# EAGLE board schema (EAGLE 7.6.0)
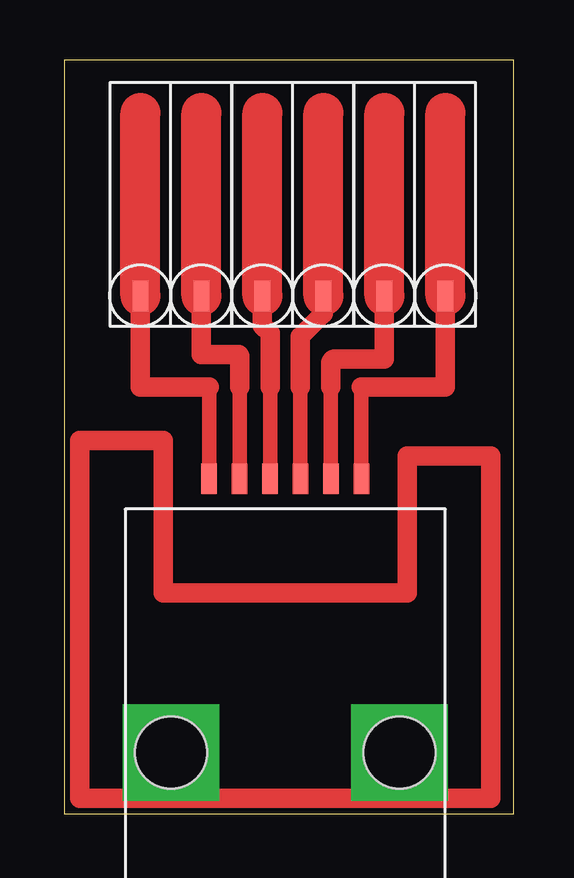
[diagram p0: board, top side]

Size 18.72 x 31.42 mm. Coordinates in mm from the lower left corner, seen from the top.
Outline: 0,0 18.72,0 18.72,31.42 0,31.42 0,0
Copper layers (1*16): Top 0.035mm / dielectric 1.5mm / Bottom 0.035mm
Design rules "default": minimum track width 10mil, minimum drill 24mil, track to track 8mil, track to pad 8mil, pad to pad 8mil, via to via 8mil, smd to smd 8mil, copper to edge 40mil, drill to drill 8mil, minimum pad ring 10mil, minimum via ring 8mil, stop-mask expansion 4mil, vias tented up to drill 0mil, thermal gap 10mil

## Footprints (pad centres in the part's own frame; a part is rotated, then mirrored left to right if it is on the bottom)
RJ12_SMD = smd 0.635 x 1.27: 1 -2.857,5.08; 2 -1.587,5.08; 3 -0.318,5.08; 4 0.953,5.08; 5 2.223,5.08; 6 3.493,5.08 | hole 3: -4.445,-6.35; 5.08,-6.35
GOLDPIN_2_SMD = smd 0.66 x 1.27: 1 -1.27,1.27; 2 1.27,1.27

## Placement (x,y rotation side)
U$1  RJ12SMD  [RJ12_SMD]  8.89,8.89 0 top
U$4  GOLDPIN_2  [GOLDPIN_2_SMD]  14.61,20.32 0 top
U$5  GOLDPIN_2  [GOLDPIN_2_SMD]  9.53,20.32 0 top
U$6  GOLDPIN_2  [GOLDPIN_2_SMD]  4.45,20.32 0 top

## Library data of the parts
U$1 U$4-U$6 = gumyns

## Nets
N$1: U$1.1 U$6.1
N$2: U$1.2 U$6.2
N$3: U$1.3 U$5.1
N$4: U$1.4 U$5.2
N$5: U$1.5 U$4.1
N$6: U$1.6 U$4.2

## Tracks (layer width: path | path; a pad name or v marks a point on that pad's centre or on a via)
N$1
  Top 0.813: 3.17,29.21 3.17,17.78 6.03,17.78
N$2
  Top 0.813: 5.71,29.21 5.71,19.15 7.21,19.15 arc-90 7.3,19.06 7.3,17.78
N$3
  Top 0.813: 8.26,29.21 8.26,20.34 8.57,20.03 8.57,17.78
N$4
  Top 0.813: 10.79,29.21 10.79,20.85 9.84,19.9 9.84,17.78
N$5
  Top 0.813: 13.34,29.21 13.34,18.95 11.28,18.95 arc90 11.11,18.78 11.11,17.78
N$6
  Top 0.813: 15.88,29.21 15.88,17.78 12.38,17.78
N$7  (via drill 3)
  other vias: 4.45,2.54
N$8  (via drill 3)
  other vias: 13.97,2.54
N$9
  Top 0.813: 0.64,13.97 0.64,13.02 0.64,0.64 17.78,0.64 17.78,14.92 14.29,14.92 14.29,9.21 4.13,9.21 4.13,15.56 0.64,15.56 0.64,13.97